# Altium PCB PCB6.PcbDoc
Units mm, origin at the board's own origin, x right, y up, seen from the top; angles counter-clockwise.
Board outline 150.04 x 80.01 mm, 2 copper layers (Top Layer, Bottom Layer); 48 components, 36 nets, 179 pads, 33 vias.
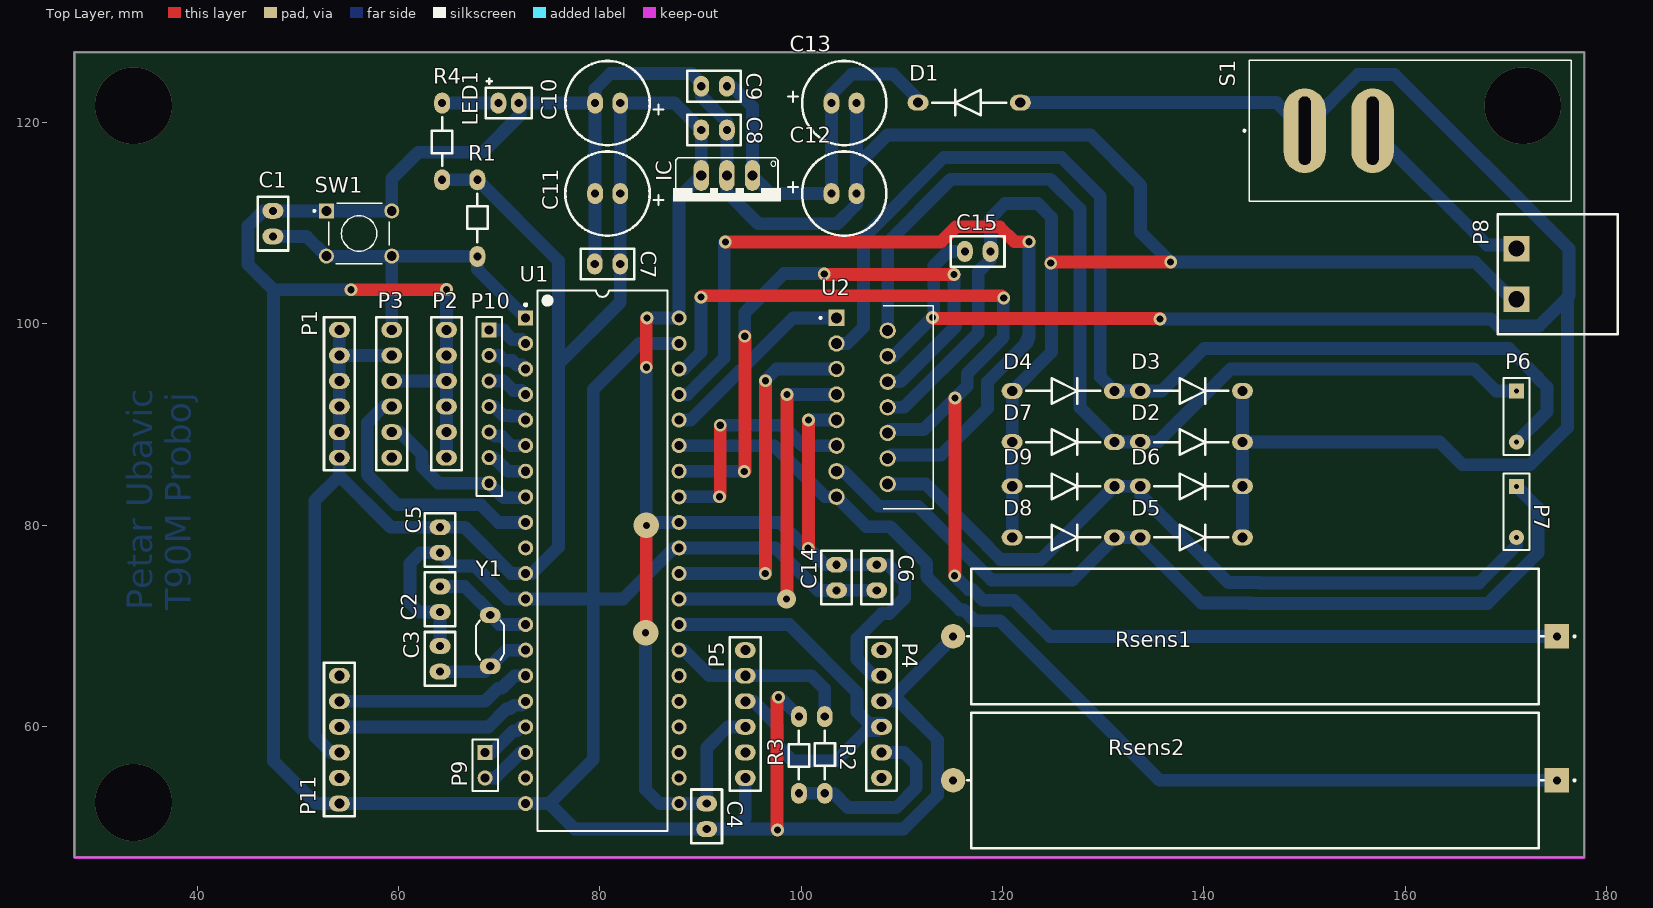
[diagram p0: Top Layer view]
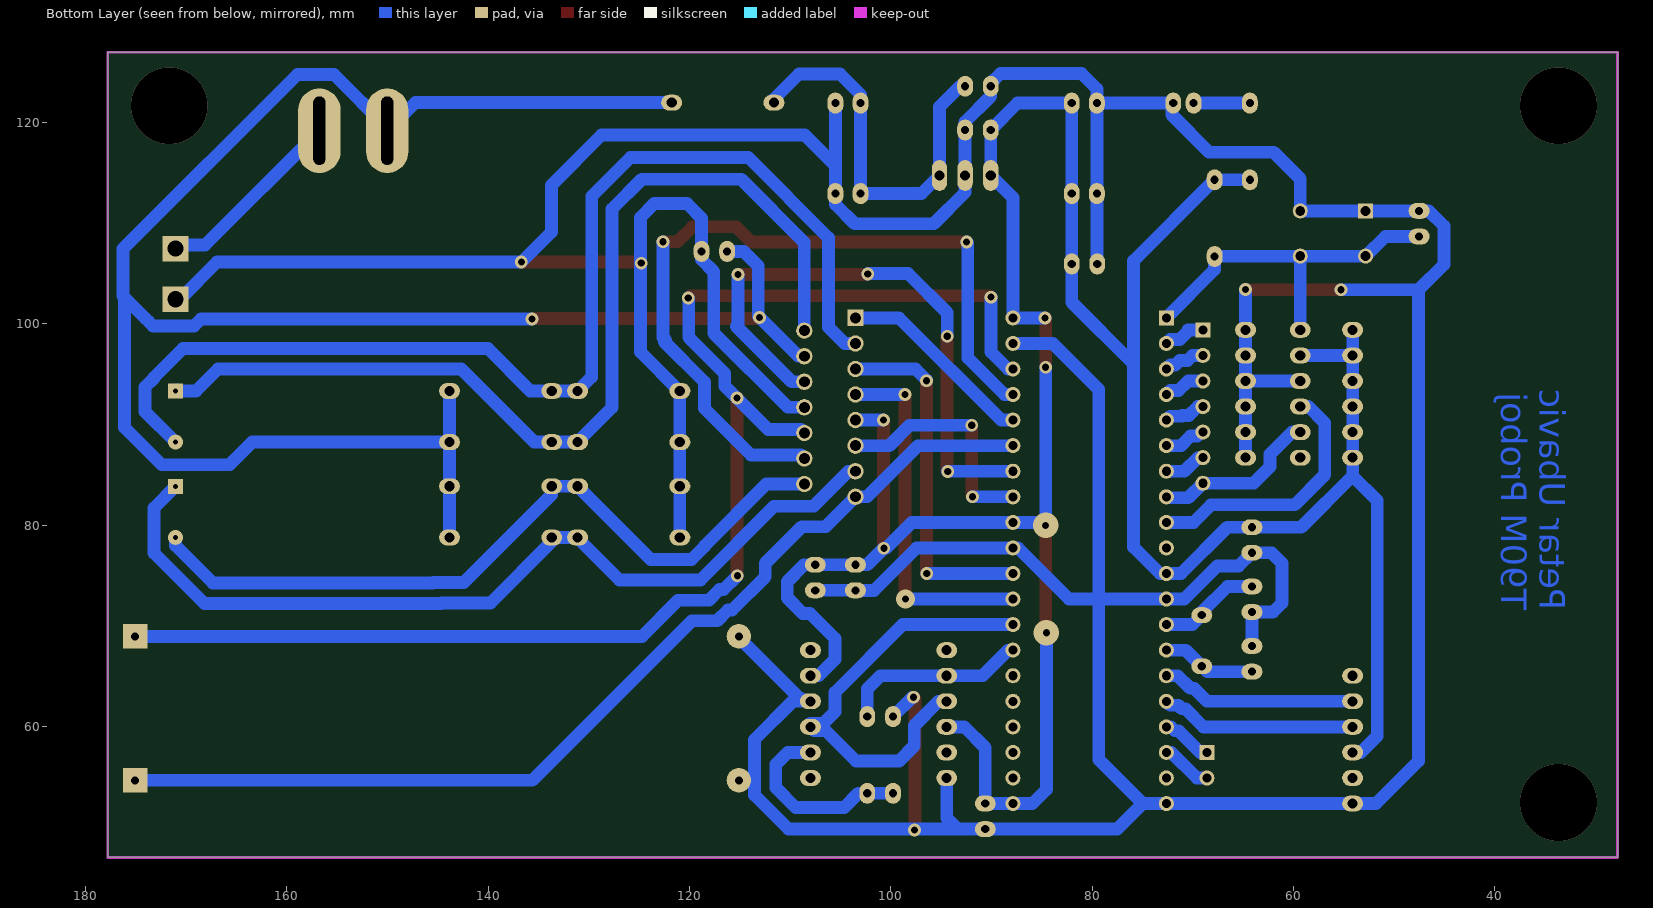
[diagram p1: Bottom Layer view, seen from below]

## Layer stack, top to bottom
Top Solder: solder mask 0.0102, Solder Resist, Dk 3.5
Top Layer: signal copper 0.0356
Dielectric 1: dielectric 0.32, FR-4, Dk 4.8
Bottom Layer: signal copper 0.0356
Bottom Solder: solder mask 0.0102, Solder Resist, Dk 3.5

## Board outline
27.762,46.99 177.8,46.99 177.8,127 27.762,127

## Design rules (kind name [scope] priority, off if disabled: settings)
Clearance Clearance_1 [InNet('No Net') And OnLayer('Top Layer') vs InNet('No Net') And OnLayer('Top Layer')] p1: gap=0.254 ignorepadtopadclearanceinfootprint=FALSE
Clearance [All] p2: gap=0.762 ignorepadtopadclearanceinfootprint=FALSE
PolygonConnect [All] p1: connectstyle=Relief reliefconductorwidth=0.254 reliefentries=4 polygonreliefangle="90 Angle" airgapwidth=0.254
RoutingVias [All] p1: holewidth=0.711 width=1.27 viastyle="Through Hole" minholewidth=0.711 minwidth=1.27 maxholewidth=0.711 maxwidth=1.27
SolderMaskExpansion [All] p1: expansion=0.102
Width [All] p1: maxlimit=1.27 minlimit=0.762 preferedwidth=1.092
30 further rules are at their usual default settings.

## Components (designator, comment, footprint, x,y, rotation, side; value= is the part's Value field where it differs from the comment)
C1 "Cap" CAP100 47.498,109.971 r270 top value=100nF
C2 "Cap" CAP100 64.11,72.644 r90 top value=33pF
C3 "Cap" CAP100 64.11,66.726 r270 top value=33pF
C4 "Cap" CAP100 90.602,51.079 r90 top value=100nF
C5 "Cap" CAP100 64.11,78.537 r90 top value=100nF
C6 "Cap" CAP100 107.493,74.803 r90 top value=100nF
C7 "Cap" CAP100 80.747,105.969 r0 top value=100nF
C8 "Cap" CAP100 91.338,119.278 r180 top value=100nF
C9 "Cap" CAP100 91.338,123.622 r0 top value=100nF
C10 "Cap Pol1" RAD4 82.017,121.945 r180 top value=470uF
C11 "Cap Pol1" RAD4 82.017,112.954 r180 top value=470uF
C12 "Cap Pol1" RAD4 102.997,112.954 r0 top value=470uF
C13 "Cap Pol1" RAD4 102.997,121.945 r0 top value=470uF
C14 "Cap" CAP100 103.505,74.803 r90 top value=100nF
C15 "Cap" CAP100 117.526,107.213 r180 top value=100nF
D1 "Diode 1N4007" DIODE400 116.942,121.996 r0 top
D2 "Diode 1N5402" DIODE400 138.506,88.265 r180 top
D3 "Diode 1N5402" DIODE400 138.506,93.345 r180 top
D4 "Diode 1N5402" DIODE400 125.781,93.345 r180 top
D5 "Diode 1N5402" DIODE400 138.506,78.791 r180 top
D6 "Diode 1N5402" DIODE400 138.506,83.871 r180 top
D7 "Diode 1N5402" DIODE400 125.781,88.265 r180 top
D8 "Diode 1N5402" DIODE400 125.781,78.791 r180 top
D9 "Diode 1N5402" DIODE400 125.781,83.871 r180 top
IC "L7805" 78XXS 92.608,112.217 r180 top
LED1 "GREEN" LED_2 70.917,122.326 r0 top
P1 "5V" HEADER_6 54.102,93.066 r0 top
P2 "GND" HEADER_6 64.745,93.066 r0 top
P3 "Programator" HEADER_6 59.308,93.066 r0 top
P4 "Bluetooth" HEADER_6 107.975,61.239 r0 top
P5 "FT232" HEADER_6 94.437,61.239 r0 top
P6 "Motor 1" KLEMA 171.069,90.678 r270 top
P7 "Motor 2" KLEMA 171.069,81.204 r270 top
P8 "2EDGRC-5.08-02P-14-00A(H)" PWR_Con 175.133,105.385 r0 top
P9 "Interrupt" HDR1X2 68.58,57.429 r270 top
P10 "GPIO" HDR1X7 68.986,99.416 r270 top
P11 "FT232" HEADER_6 54.102,58.699 r0 top
R1 "Res1" RES400 67.818,110.515 r90 top value=10K
R2 "Res1" RES400 102.337,57.175 r90 top value=4.7K
R3 "Res1" RES400 99.771,57.175 r270 top value=10K
R4 "Res1" RES400 64.313,118.135 r270 top value=1K
Rsens1 "15W" Rsens 145.085,68.961 r180 top value=5
Rsens2 "15W" Rsens 145.085,54.661 r180 top value=5
S1 "" SW_RB141C1100 160.528,119.202 r180 top
SW1 "TASTER" SW_1825910-6-4 56.058,108.991 r0 top
U1 "DSPIC30F4013-20I/P" PDIP600-P40 80.239,76.479 r0 top
U2 "L298N" TO127P2020X500X2100-15 103.505,100.609 r0 top
Y1 "XTAL" OSC_5 69.088,68.91 r0 top

## Footprints (in the part's own frame and the unit in brackets; to place one, negate y for a bottom-side part, rotate by r counter-clockwise, add the part's x,y. Pads: shape width x height; smd on the part's side, far side on the other; paste and mask are expansions set on the pad)
78XXS [mil]
  oval 60x120 hole 40: GND(0,-100) IN(-100,-100) OUT(100,-100)
  silkscreen extent -210,-170 210,0
CAP100 [mil]
  oval 62x82 hole 32: 1(-50,0) 2(50,0)
  silkscreen extent -105,-60 105,60
DIODE400 [mil]
  oval 82x62 hole 40: 1(190,0) 2(-210,0)
  silkscreen extent -155,-50 135,50
HDR1X2 [mm] "Connector; Header; 2 Position"
  rect 1.5x1.5 hole 0.9: 1(0,0)
  round 1.5 hole 0.9: 2(2.54,0)
  silkscreen extent -1.27,-1.27 3.81,1.27
HDR1X7 [mm] "Connector; Header; 7 Position"
  rect 1.5x1.5 hole 0.9: 1(0,0)
  round 1.5 hole 0.9: 2(2.54,0) 3(5.08,0) 4(7.62,0) 5(10.16,0) 6(12.7,0) 7(15.24,0)
  silkscreen extent -1.27,-1.27 16.51,1.27
HEADER_6 [mil]
  oval 82x62 hole 39.37: 1(0,250) 2(0,150) 3(0,50) 4(0,-50) 5(0,-150) 6(0,-250)
  silkscreen extent -60,-300 60,300
KLEMA [mm] "Connector; Header; 2 Position"
  rect 1.5x1.5 hole 0.5: 1(-2.667,0)
  round 1.5 hole 0.5: 2(2.413,0)
  silkscreen extent -3.94,-1.27 3.68,1.27
LED_2 [mil]
  oval 62x82 hole 32: 1(40,-15) 2(-40,-15)
  silkscreen extent -90,-75 90,80, body extent -105,-126 110,106, height 346
OSC_5 [mil]
  oval 82x62 hole 32: 1(0,-115) 2(0,85)
  silkscreen extent -55,-90 55,65, body extent -92,-240 92,207, height 138
PDIP600-P40 [mm] "DIP, 40-Leads, Row Spacing 15.24mm, Pitch 2.54mm, Body 51.8x13.5mm"
  rect 1.5x1.5 hole 0.9: 1(-7.62,24.13)
  round 1.5 hole 0.9: 2(-7.62,21.59) 3(-7.62,19.05) 4(-7.62,16.51) 5(-7.62,13.97) 6(-7.62,11.43) 7(-7.62,8.89) 8(-7.62,6.35) 9(-7.62,3.81) 10(-7.62,1.27) 11(-7.62,-1.27) 12(-7.62,-3.81) 13(-7.62,-6.35) 14(-7.62,-8.89) 15(-7.62,-11.43) 16(-7.62,-13.97) 17(-7.62,-16.51) 18(-7.62,-19.05) 19(-7.62,-21.59) 20(-7.62,-24.13) 21(7.62,-24.13) 22(7.62,-21.59) 23(7.62,-19.05) 24(7.62,-16.51) 25(7.62,-13.97) 26(7.62,-11.43) 27(7.62,-8.89) 28(7.62,-6.35) 29(7.62,-3.81) 30(7.62,-1.27) 31(7.62,1.27) 32(7.62,3.81) 33(7.62,6.35) 34(7.62,8.89) 35(7.62,11.43) 36(7.62,13.97) 37(7.62,16.51) 38(7.62,19.05) 39(7.62,21.59) 40(7.62,24.13)
  silkscreen extent -7.74,-26.85 6.45,26.85, body extent -7.3,-26.85 7.3,26.85, height 6.35
PWR_Con [mil]
  rect 100x100 hole 62.99: 1(-160,-115) 2(-160,83)
  silkscreen extent -234,-253 236,217, body extent -239,-256 234,222, height 344
RAD4 [mil]
  oval 62x82 hole 32: 1(0,0) 2(98.43,0)
  silkscreen extent -170,-165 215,165
RES400 [mil]
  oval 82x62 hole 32: 1(-150,0) 2(150,0)
  silkscreen extent -95,-40 95,40
Rsens [mm]
  rect 2.43x2.43 / inner round 2.43 / far side rect 2.43x2.43 hole 0.8: 1(-30,0)
  round 2.43 hole 0.8: 2(30,0)
  silkscreen extent -31.85,-6.73 28.57,6.73
SW_1825910-6-4 [mm]
  rect 1.498x1.498 hole 0.99: 1(-3.25,2.25)
  round 1.498 hole 0.99: 2(3.25,2.25) 3(-3.25,-2.25) 4(3.25,-2.25)
  silkscreen extent -4.54,-3 3,3
SW_RB141C1100 [mm]
  oval 4.2x8.4 hole 1.2 slot 6.8 at 90 deg: 1(10.5,0) 2(3.757,0)
  silkscreen extent -16,-7 16.6,7, body extent -16.35,-7 16.35,7, height 24.57
TO127P2020X500X2100-15 [mm]
  rect 1.62x1.62 hole 1.08: 1(0,0)
  round 1.62 hole 1.08: 2(5.08,-1.27) 3(0,-2.54) 4(5.08,-3.81) 5(0,-5.08) 6(5.08,-6.35) 7(0,-7.62) 8(5.08,-8.89) 9(0,-10.16) 10(5.08,-11.43) 11(0,-12.7) 12(5.08,-13.97) 13(0,-15.24) 14(5.08,-16.51) 15(0,-17.78)
  silkscreen extent -1.69,-18.99 9.63,1.21

## Part data
C1 C2 C3 C4 C5 C6 C7 C8 C9 C14 C15: "Capacitor", LatestRevisionDate=17-Jul-2002, LatestRevisionNote="Re-released for DXP Platform.", PackageDescription="Radial Cap, Thru-Hole; 2 Leads; 0.3 in Pin Spacing", PackageReference=RAD-0.3, Published=8-Jun-2000, Publisher="Altium Limited"
C10 C11 C12 C13: "Polarized Capacitor (Radial)", LatestRevisionDate=17-Jul-2002, LatestRevisionNote="Re-released for DXP Platform.", PackageDescription="Polarized Capacitor (Radial); 2 Leads", PackageReference=RB7.6-15, Published=8-Jun-2000, Publisher="Altium Limited"
D1: "1 Amp General Purpose Rectifier", Code_JEDEC=DO-204-AL, ComponentLink1Description="Manufacturer Link", ComponentLink1URL=http://www.fairchildsemi.com/, ComponentLink2Description=Datasheet, ComponentLink2URL=http://www.fairchildsemi.com/ds/1N%2F1N4001.pdf, DatasheetVersion=1998, LatestRevisionDate=17-Jul-2002, LatestRevisionNote="Re-released for DXP Platform.", PackageDescription="Diode, Axial; Body 5.2 x 2.7 mm (LxDia. max), Lead Dia. 0.86 mm (max)", PackageReference=DO-41, PackageVersion=Aug-1999, Published=8-Jun-2000, Publisher="Altium Limited"
D2 D3 D4 D5 D6 D7 D8 D9: "3 Amp General Purpose Rectifier", ComponentLink1Description="Manufacturer Link", ComponentLink1URL=http://www.fairchildsemi.com/, ComponentLink2Description=Datasheet, ComponentLink2URL=http://www.fairchildsemi.com/ds/1N%2F1N5400.pdf, DatasheetVersion=1998, LatestRevisionDate=17-Jul-2002, LatestRevisionNote="Re-released for DXP Platform.", PackageDescription="Diode, Axial; Body 9.5 x 5.6 mm (LxDia. max), Lead Dia. 1.32 mm (max)", PackageReference=DO-201AD, PackageVersion=Aug-1999, Published=8-Jun-2000, Publisher="Altium Limited"
IC: "Linear Voltage Regulator IC 1 Output 1.5A D2PAK", Package="TO-263-3 Inchange Semiconductor", Availability=Unavailable, MF=STMicroelectronics, MP=L7805, Price=None, SnapEDA_Link=https://www.snapeda.com/parts/L7805/STMicroelectronics/view-part/563125/?ref=snap
LED1: library part LED1, "Typical RED GaAs LED", LatestRevisionDate=08-Jul-2005, LatestRevisionNote="Mech Layer 1 removed.", PackageDescription="LED; 2 Leads", PackageReference=LED-1, Published=8-Jun-2000, Publisher="Altium Limited"
P1 P2 P3 P4 P5 P11: library part "Header 6", "Header, 6-Pin", LatestRevisionDate=17-Jul-2002, LatestRevisionNote="Re-released for DXP Platform.", Publisher="Altium Limited"
P6 P7 P9: library part "Header 2", "Header, 2-Pin", LatestRevisionDate=17-Jul-2002, LatestRevisionNote="Re-released for DXP Platform.", Publisher="Altium Limited"
P8: library part 00000002, "TERM BLOCK HDR 2POS 90DEG 5.08MM", Manufacturer Part Number=2EDGRC-5.08-02P-14-00A(H), Price=0.1304, Suplier=TME, Suplier Product Link=https://www.tme.eu/en/details/2edgrc5.08-2p14/pluggable-terminal-blocks/degson-electronics/2edgrc-508-02p-14-00ah/
P10: library part "Header 7", "Header, 7-Pin", LatestRevisionDate=17-Jul-2002, LatestRevisionNote="Re-released for DXP Platform.", Publisher="Altium Limited"
R1 R2 R3 R4: "Resistor", LatestRevisionDate=17-Jul-2002, LatestRevisionNote="Re-released for DXP Platform.", PackageDescription="Axial Device, Thru-Hole; 2 Leads; 0.3 in Pin Spacing", PackageReference=AXIAL-0.3, Published=8-Jun-2000, Publisher="Altium Limited"
Rsens1 Rsens2: library part Res1, "Resistor", LatestRevisionDate=17-Jul-2002, LatestRevisionNote="Re-released for DXP Platform.", PackageDescription="Axial Device, Thru-Hole; 2 Leads;", Published=8-Jun-2000, Publisher="Altium Limited"
S1: library part RB141C1100, "Rocker Switches 15A 125VAC, OFF-ON, Black Rocker, No Markings", Package=None, Availability="In Stock", Check_prices=https://www.snapeda.com/parts/RB141C1100/ITC/view-part/?ref=eda, MF="e-switch inc", MP=RB141C1100, Price=None, Purchase-URL=https://pricing.snapeda.com/search/part/RB141C1100/?ref=eda, SnapEDA_Link=https://www.snapeda.com/parts/RB141C1100/ITC/view-part/?ref=snap
SW1: library part 1825910-6, "Switch Tactile OFF (ON) SPST Round Button PC Pins 0.05A 24VDC 100000Cycles 1.57N Thru-Hole Loose", Package=None, Availability=Unavailable, MP=1825910-6, Price=None
U1: "High-Performance 16-bit Digital Signal Controller, 48 KB Flash, 2 KB SRAM, 1 KB EEPROM, 40-Pin PDIP, Industrial Temperature", Supplier Part Number 1=DSPIC30F4013-20IP-ND, ComponentLink1Description=Datasheet, ComponentLink1URL=http://ww1.microchip.com/downloads/en/DeviceDoc/70138F.pdf, ComponentLink2Description="Packaging Specification", ComponentLink2URL=http://www.microchip.com/stellent/groups/techpub_sg/documents/packagingspec/en012702.pdf, ComponentLink3Description="Microchip.com Home", ComponentLink3URL=http://www.microchip.com/, DatasheetVersion="revF, Apr-2008", PackageDescription="40-Lead Plastic Dual In-Line (P) - 600 mil Body [PDIP]", PackageReference=PDIP600-P40, PackageVersion="revBB, Aug-2009", Published=29-Jan-2009, Publisher="Altium Limited", Supplier 1=Digi-Key, Supplier 2=Farnell, Supplier Part Number 2=1439755
U2: "Dual Full Bridge Motor Driver 15-Pin(15+Tab) MULTIWATT V Tube", Package=None, Availability=Unavailable, MP=L298N, Price=None
Y1: "Crystal Oscillator", LatestRevisionDate=17-Jul-2002, LatestRevisionNote="Re-released for DXP Platform.", PackageDescription="Crystal, Thru-Hole; 2 Leads; Body 3.1 x 8.2 mm (Dia.xH)", PackageReference=R38, Published=8-Jun-2000, Publisher="Altium Limited"

## Via types
v1: diameter 1.27, hole 0.711, Top Layer to Bottom Layer, 27 vias
v2: diameter 7.62, hole 7.62, Top Layer to Bottom Layer, 3 vias
v3: diameter 2.54, hole 0.711, Top Layer to Bottom Layer, 2 vias
v4: diameter 1.905, hole 0.711, Top Layer to Bottom Layer, 1 vias

## Nets (pads, with @x,y where several pads share a name; then routed paths per layer and width w, separated by ;. In a path a pad name is that pad's centre, name@x,y a point inside that pad or via, vN(x,y) a via of type N, cw(c..) or ccw(c..) an arc to the next point about the centre after c; other vN are vias at no path point)
+5: C4.2 C5.2 C6.2 C7.2 C8.2 C10.1 C11.1 C14.2 IC.OUT P1.1 P1.2 P1.3 P1.4 P1.5 P1.6 P3.2 P4.2 P5.4 P11.4 R1.2 R4.2 U1.11 U1.21 U1.32 U1.40 U2.9 | length 301.1
  Top Layer w1.27: v3(84.531,69.317) 84.607,69.393 v3(84.607,79.985) ; v1(84.607,95.707) 84.607,100.559 v1(84.658,100.609) ; v1(100.686,77.724) 100.711,77.749 v1(100.711,90.449)
  Bottom Layer w1.27: P11.4 53.299,57.429 51.664,59.065 51.664,82.47 54.102,84.909 ; P1.1 P1.2 ; P3.2 P1.2 ; R4.2 R1.2 75.87,106.274 75.87,96.012 ; v3(84.531,69.317) 84.531,53.746 85.928,52.349 U1.21 C4.2 90.602,57.887 92.685,59.969 P5.4 ; v1(84.607,95.707) v3(84.607,79.985) 84.912,80.289 U1.32 97.917,80.289 100.482,77.724 v1(100.686,77.724) 102.337,76.073 C14.2 C6.2 108.61,76.073 110.287,74.397 110.287,72.796 108.737,71.247 108.026,71.247 105.537,68.758 105.537,66.685 107.172,65.049 P4.2 ; v1(84.658,100.609) U1.40 87.859,112.547 IC.OUT C8.2 87.401,121.945 C10.1 C11.1 C7.2 82.017,102.159 75.87,96.012 ; v1@100.736,90.449 U2.9 ; 54.102,84.909 59.204,79.807 C5.2 66.567,79.807 71.165,75.209 U1.11 73.254,75.209 75.87,77.826 75.87,96.012 ; 54.102,84.909 P1.6 P1.5 P1.4 P1.3 P1.2
GND: C1.1 C2.1 C3.1 C4.1 C5.1 C6.1 C7.1 C8.1 C9.1 C10.2 C11.2 C12.2 C13.2 C14.1 C15.1 D4.1 D7.1 D8.1 D9.1 IC.GND LED1.1 P2.1 P2.2 P2.3 P2.4 P2.5 P2.6 P3.3 P4.3 P5.6 P8.1 P11.6 R3.1 Rsens1.2 Rsens2.2 SW1.1 SW1.2 U1.12 U1.20 U1.31 U1.39 U2.8 | length 586.4
  Top Layer w1.27: v1(55.27,103.403) 64.719,103.403 v1(64.745,103.429) ; v1(97.638,49.708) 97.587,49.759 97.587,62.763 v1(97.739,62.916) ; v1(124.79,106.045) 124.892,106.147 v1(136.703,106.147)
  Bottom Layer w1.27: v1(55.27,103.403) 47.549,103.403 ; P3.3 P2.3 ; C3.1 C2.1 62.027,71.374 61.112,72.288 61.112,76.225 62.154,77.267 C5.1 65.43,75.946 67.554,75.946 70.831,72.669 U1.12 79.324,72.669 ; P2.6 P2.5 P2.4 P2.3 ; v1(64.745,103.429) P2.1 P2.2 P2.3 ; C7.1 79.517,106.009 C11.2 C10.2 ; U1.39 83.896,98.069 79.324,93.497 79.324,72.669 ; P5.6 94.437,50.927 93.32,49.809 ; v1(97.739,62.916) 97.841,62.916 R3.1 ; C13.2 105.497,115.722 ; C6.1 C14.1 103.48,73.508 101.676,73.508 97.434,77.749 U1.31 87.362,77.749 82.282,72.669 79.324,72.669 ; P4.3 P4.3@108.633,62.509 ; 108.545,118.77 105.497,115.722 ; U2.8 110.214,91.719 117.577,99.082 117.577,105.191 118.796,106.41 C15.1 118.796,110.515 120.244,111.963 123.495,111.963 124.866,110.592 124.866,97.206 121.006,93.345 D4.1 D7.1 D9.1 D8.1 ; 108.824,118.77 128.727,118.77 133.706,113.792 133.706,109.144 v1(136.703,106.147) 166.953,106.147 170.636,102.464 P8.1 ; Rsens2.2 113.563,54.661 113.538,54.635 ; Rsens1.2 115.085,68.816 109.474,63.205 109.474,62.865 108.989,62.865 P4.3@108.633,62.509 ; 47.549,103.403 47.549,56.591 51.791,52.349 P11.6 U1.20 74.955,52.349 ; 47.549,103.403 45.034,105.918 45.034,109.728 46.548,111.241 C1.1 SW1.1 SW1.2 59.308,114.426 61.951,117.069 68.367,117.069 72.085,120.787 72.085,121.945 C10.2 ; 74.955,52.349 77.495,49.809 C4.1 93.32,49.809 ; 74.955,52.349 79.324,56.718 79.324,72.669 ; C10.2 79.517,123.352 81.056,124.892 89.103,124.892 90.068,123.927 C9.1 90.068,122.622 92.608,120.082 C8.1 IC.GND 92.608,113.081 95.733,109.957 103.581,109.957 105.497,111.872 C12.2 105.497,115.722 ; 93.32,49.809 110.163,49.809 113.538,53.184 113.538,54.635 ; P4.3@108.633,62.509 109.728,62.509 113.538,58.699 113.538,54.635
INT0: P9.1 U1.17 | length 5.1
  Bottom Layer w1.27: P9.1 69.249,57.429 71.396,59.576 71.766,59.576 72.159,59.969 U1.17
INT2: P9.2 U1.18 | length 5.1
  Bottom Layer w1.27: P9.2 69.582,54.889 72.122,57.429 U1.18
MCLR: C1.2 P3.1 R1.1 SW1.3 SW1.4 U1.1 | length 36.7
  Bottom Layer w1.27: C1.2 50.848,108.701 SW1.3 SW1.4 ; P3.1 SW1.4 ; U1.1@72.502,100.493 U1.1 67.818,105.41 R1.1 67.782,106.741 SW1.4
NetC9_2: C9.2 C12.1 C13.1 D1.2 IC.IN | length 39.5
  Bottom Layer w1.27: C9.2 93.116,123.622 95.148,121.59 IC.IN 96.952,112.954 C12.1 C13.1 102.997,122.789 105.049,124.841 109.118,124.841 111.608,122.352 D1.2
NetLED1_1: LED1.2 R4.1 | length 5.6
  Bottom Layer w1.27: R4.1 LED1.2
NetP4_5: P4.5 R2.1 R3.2 | length 19.3
  Bottom Layer w1.27: R3.2 R2.1 103.226,53.365 104.623,51.968 109.449,51.968 111.43,53.95 111.43,56.236 110.236,57.429 P4.5
NetP8_2: P8.2 S1.2 | length 19.1
  Bottom Layer w1.27: S1.2 168.124,107.85 170.712,107.85 P8.2
OSC1: C2.2 U1.13 Y1.2 | length 10.3
  Bottom Layer w1.27: C2.2 66.548,73.914 69.088,71.374 Y1.2 70.028,70.129 U1.13
OSC2: C3.2 U1.14 Y1.1 | length 9.4
  Bottom Layer w1.27: C3.2 68.555,65.456 Y1.1 70.688,67.589 U1.14
OUT1: D2.1 D7.2 P6.1 U2.2 | length 100.3
  Bottom Layer w1.27: U2.2 108.585,108.099 114.862,114.376 124.739,114.376 127.686,111.43 127.686,91.694 D7.2 D2.1 135.417,88.265 142.681,95.529 166.853,95.529 169.037,93.345 P6.1 P6.1@170.954,93.46
OUT2: D3.1 D4.2 P6.2 U2.3 | length 113.6
  Bottom Layer w1.27: U2.3 104.561,98.069 106.172,99.681 106.172,108.56 114.148,116.535 125.857,116.535 129.718,112.674 129.718,94.742 D4.2 D3.1 135.814,93.345 140.03,97.561 170.328,97.561 173.216,94.674 173.216,94.602 174.092,93.726 174.092,91.288 P6.2
OUT3: D5.1 D8.2 P7.1 U2.13 | length 88.5
  Bottom Layer w1.27: U2.13 104.194,85.369 107.671,81.892 111.595,81.892 118.913,74.574 126.949,74.574 131.115,78.74 D8.2 D5.1 133.68,78.384 139.776,72.288 144.606,72.288 144.656,72.238 168.199,72.238 173.216,77.255 173.216,81.724 P7.1
OUT4: D6.1 D9.2 P7.2 U2.14 | length 75.4
  Bottom Layer w1.27: U2.14 112.37,84.099 118.516,77.953 118.516,77.886 119.796,76.606 123.85,76.606 D9.2 D6.1 133.68,83.058 142.418,74.32 145.447,74.32 145.498,74.27 167.357,74.27 171.069,77.981 P7.2
PGC: P3.5 P10.7 U1.8 | length 16.8
  Bottom Layer w1.27: P3.5 60.111,89.256 62.306,87.06 62.306,85.811 63.941,84.176 P10.7 70.434,82.728 72.517,82.728 U1.8
PGD: P3.4 U1.9 | length 26
  Bottom Layer w1.27: P3.4 58.505,91.796 56.869,90.16 56.869,85.015 59.856,82.029 68.187,82.029 69.926,80.289 U1.9
PWM1: U1.34 U2.6 | length 59.1
  Top Layer w1.27: v1(94.336,85.344) 94.412,85.42 v1@94.412,98.806 ; v1(102.286,104.978) 102.337,104.927 v1(115.189,104.927)
  Bottom Layer w1.27: U1.34 v1@94.386,85.369 ; v1(94.386,98.781) 94.386,101.117 98.298,105.029 102.235,105.029 v1(102.286,104.978) ; U2.6 109.83,94.259 115.341,99.771 115.189,99.924 v1(115.189,104.927)
PWM2: U1.33 U2.11 | length 23.6
  Top Layer w1.27: v1(91.872,82.829) 91.948,82.906 v1(91.948,89.941)
  Bottom Layer w1.27: U1.33 v1(91.872,82.829) ; v1(91.948,89.941) 98.124,89.941 100.156,87.909 U2.11
RB0: P10.1 U1.2 | length 4.3
  Bottom Layer w1.27: P10.1 70.472,99.416 70.472,99.281 71.29,98.462 71.659,98.462 71.661,98.461 72.227,98.461 U1.2
RB1: P10.2 U1.3 | length 4.2
  Bottom Layer w1.27: P10.2 70.003,96.876 70.511,96.368 71.284,96.368 71.729,95.922 72.226,95.922 U1.3
RB2: P10.3 U1.4 | length 4.2
  Bottom Layer w1.27: P10.3 70.442,94.336 71.396,93.382 72.226,93.382 U1.4
RB3: P10.4 U1.5 | length 4.2
  Bottom Layer w1.27: P10.4 69.483,91.796 70.384,90.895 71.051,90.895 71.103,90.842 72.226,90.842 U1.5
RB4: P10.5 U1.6 | length 4.2
  Bottom Layer w1.27: P10.5 69.149,89.256 69.542,88.863 70.209,88.863 71.163,87.909 U1.6
RB5: P10.6 U1.7 | length 4.2
  Bottom Layer w1.27: P10.6 69.483,86.716 70.829,85.369 U1.7
RB9: Rsens1.1 U1.38 U2.10 | length 138.7
  Top Layer w1.27: v1(90.043,102.667) 90.193,102.816 119.891,102.816 v1(120.117,102.591) ; v1(115.24,74.981) 115.265,75.006 v1(115.265,92.659)
  Bottom Layer w1.27: U1.38 88.355,95.529 90.043,97.217 v1(90.043,102.667) ; U2.10 108.918,89.512 112.169,89.512 116.484,93.828 116.484,95.091 120.066,98.673 120.066,102.54 v1(120.117,102.591) ; v1(115.24,74.981) 116.616,73.605 117.008,73.605 118.071,72.542 121.133,72.542 124.714,68.961 Rsens1.1
RB10: U1.37 U2.12 | length 79.4
  Top Layer w1.27: v1(92.456,108.153) 113.852,108.153 115.351,109.652 119.701,109.652 121.174,108.179 v1(122.631,108.179)
  Bottom Layer w1.27: U1.37 88.689,92.989 92.329,96.63 92.304,96.655 92.354,96.706 92.354,108.052 v1(92.456,108.153) ; U2.12 108.918,86.972 113.871,86.972 118.516,91.618 118.516,94.25 122.504,98.238 122.352,98.39 122.631,98.669 v1(122.631,108.179)
RB11: U1.36 U2.1 | length 19.9
  Bottom Layer w1.27: U1.36 89.022,90.449 99.182,100.609 U2.1
RB12: Rsens2.1 U1.35 U2.15 | length 101.8
  Bottom Layer w1.27: U1.35 97.282,87.909 102.362,82.829 U2.15 106.474,79.86 108.836,79.86 112.471,76.225 112.471,74.876 115.774,71.573 116.167,71.573 117.229,70.51 119.761,70.51 135.611,54.661 Rsens2.1
RF0: U1.30 U2.5 | length 35.3
  Top Layer w1.27: v1(96.418,75.209) 96.444,75.235 v1(96.444,94.361)
  Bottom Layer w1.27: U1.30 v1(96.418,75.209) ; v1(96.444,94.361) 96.444,94.437 97.536,95.529 U2.5
RF1: U1.29 U2.7 | length 35.9
  Top Layer w1.27: v4(98.527,72.669) 98.577,72.72 v1(98.577,92.989)
  Bottom Layer w1.27: U1.29 v4(98.527,72.669) ; v1@98.628,92.989 U2.7
U1ARX: P11.3 U1.16 | length 19.6
  Bottom Layer w1.27: P11.3 68.915,59.969 70.718,61.773 71.088,61.773 71.432,62.116 72.226,62.116 U1.16
U1ATX: P11.2 U1.15 | length 19.6
  Bottom Layer w1.27: P11.2 68.581,62.509 69.877,63.805 70.247,63.805 71.491,65.049 U1.15
U2RX: P4.4 P5.3 U1.28 | length 44.2
  Bottom Layer w1.27: U1.28 98.806,70.129 105.537,63.398 105.537,61.468 106.68,60.325 107.975,60.325 P4.4 107.62,59.614 106.483,59.614 103.46,56.591 99.162,56.591 97.663,58.09 97.663,60.087 95.24,62.509 P5.3
U2TX: P5.2 R2.2 U1.27 | length 18.8
  Bottom Layer w1.27: U1.27 88.355,67.589 90.895,65.049 P5.2 101.012,65.049 102.337,63.725 R2.2
VCC: C15.2 D1.1 D2.2 D3.2 D5.2 D6.2 S1.1 U2.4 | length 211.7
  Top Layer w1.27: v1(113.03,100.635) 113.132,100.533 135.585,100.533 v1(135.636,100.482)
  Bottom Layer w1.27: U2.4 109.166,96.799 113.157,100.79 113.157,105.769 114.601,107.213 C15.2 ; D1.1 147.234,121.996 S1.1 150.028,119.504 155.323,124.799 158.944,124.799 176.276,107.467 176.276,102.774 176.124,102.622 ; v1(135.636,100.482) 168.535,100.482 169.22,99.797 173.299,99.797 173.736,100.234 ; D5.2@143.764,78.715 D5.2 D6.2 D2.2 ; D3.2 D2.2 ; 174.035,100.533 176.124,102.622 ; D2.2 163.449,88.265 165.696,86.018 172.398,86.018 172.411,86.004 176.124,89.717 176.124,102.622
pads on no net: P3.6 P4.1 P4.6 P5.1 P5.5 P11.1 P11.5 U1.10 U1.19 U1.22 U1.23 U1.24 U1.25 U1.26
copper on no net:
  other v2: 33.655,52.451 33.655,121.691 171.704,121.691

## Keep-outs
Keep-Out Layer:
  lines w0.254: 27.788,46.99 27.788,127 177.8,127 177.8,46.99 27.788,46.99

## Other copper
Bottom Layer:
  text "Petar Ubavic / T90M Proboj" at 39.345,71.552 h2.54 r90

## Text inside footprints (layer, text, board x,y; h text height)
IC: Mechanical 13 "-" at 93.244,116.029 h1.27 r180; Mechanical 13 "I" at 95.787,116.032 h1.27 r180; Mechanical 13 "O" at 90.702,116.03 h1.27 r180